# Altium PCB RadioPod-0_1.PcbDoc
Units mm, origin at the board's own origin, x right, y up, seen from the top; angles counter-clockwise.
Board outline 48.8 x 62.2 mm, 2 copper layers (Top Layer, Bottom Layer), stack 0.325 mm thick; 80 components, 115 nets, 434 pads, 94 vias.
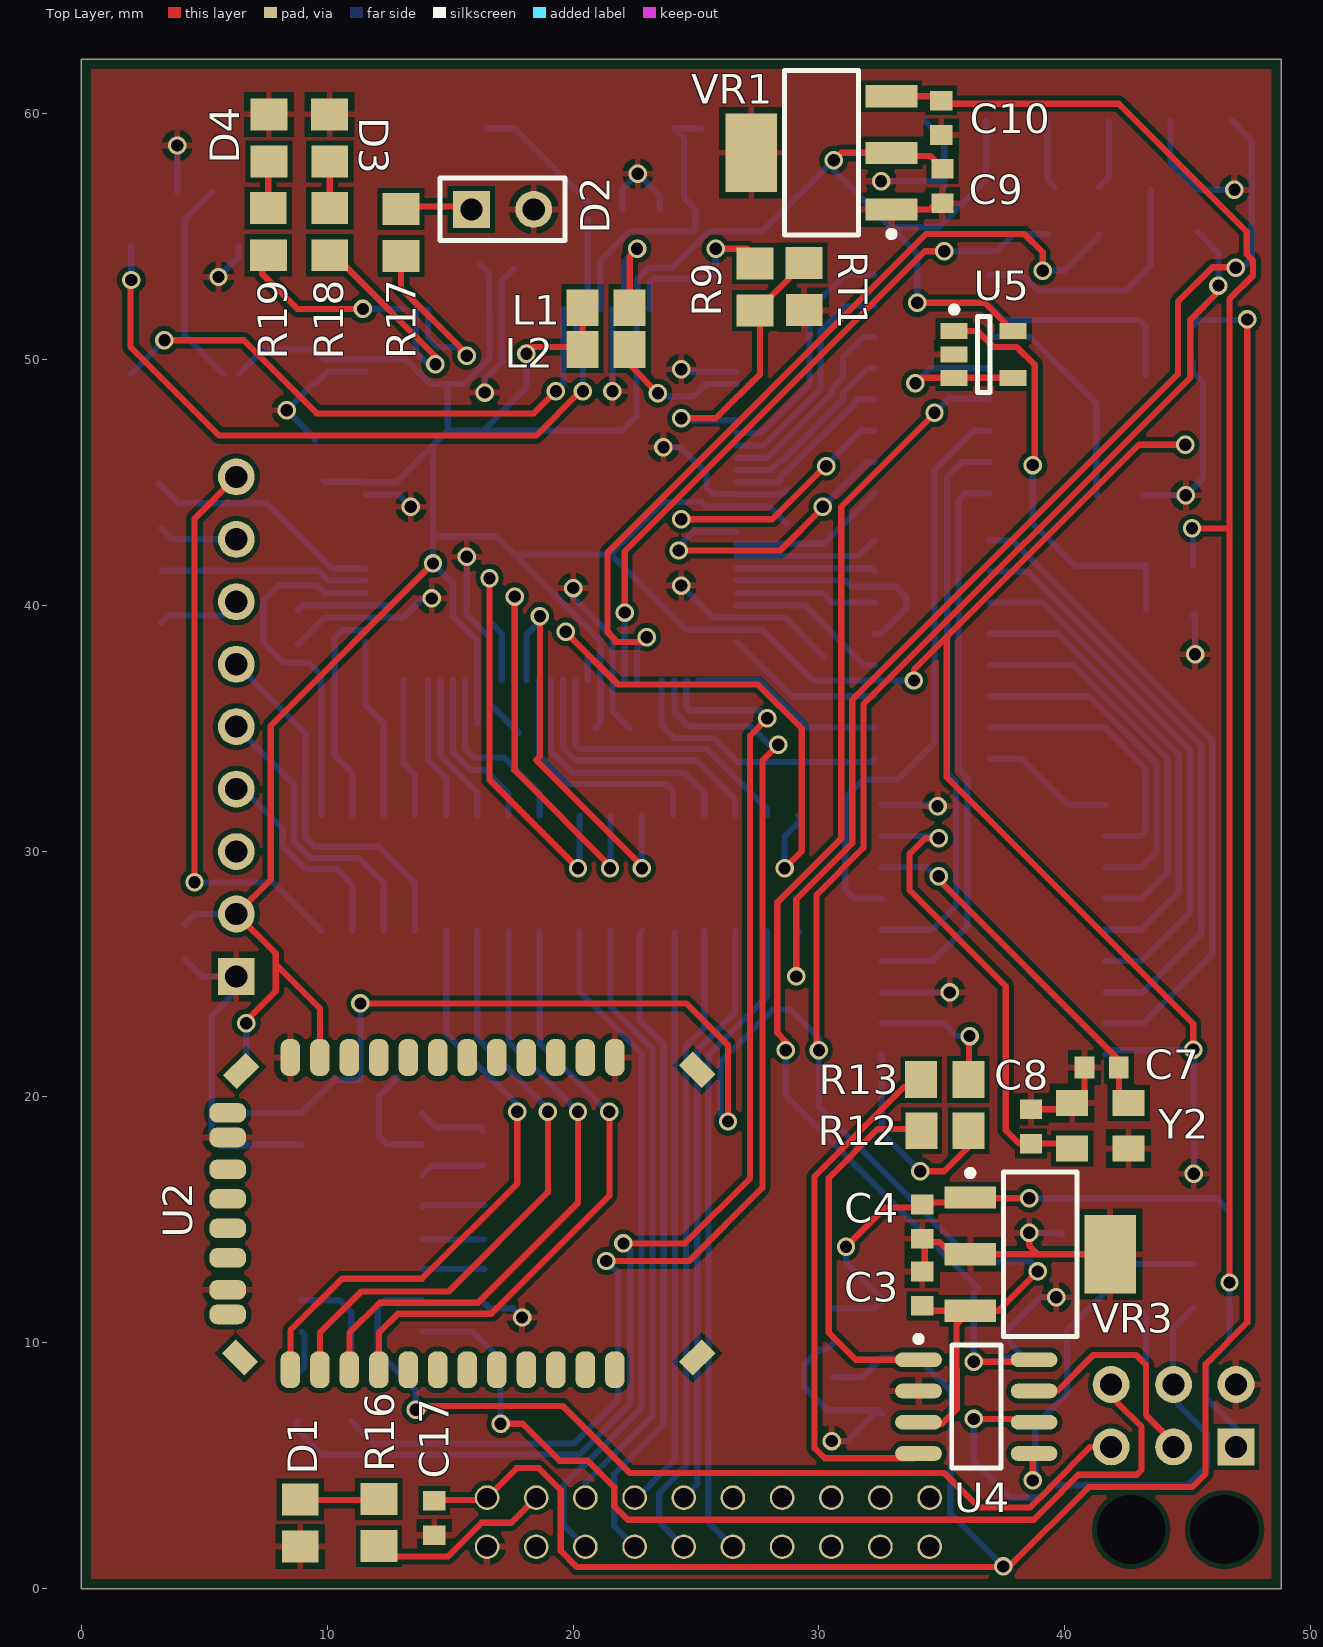
[diagram p0: Top Layer view]
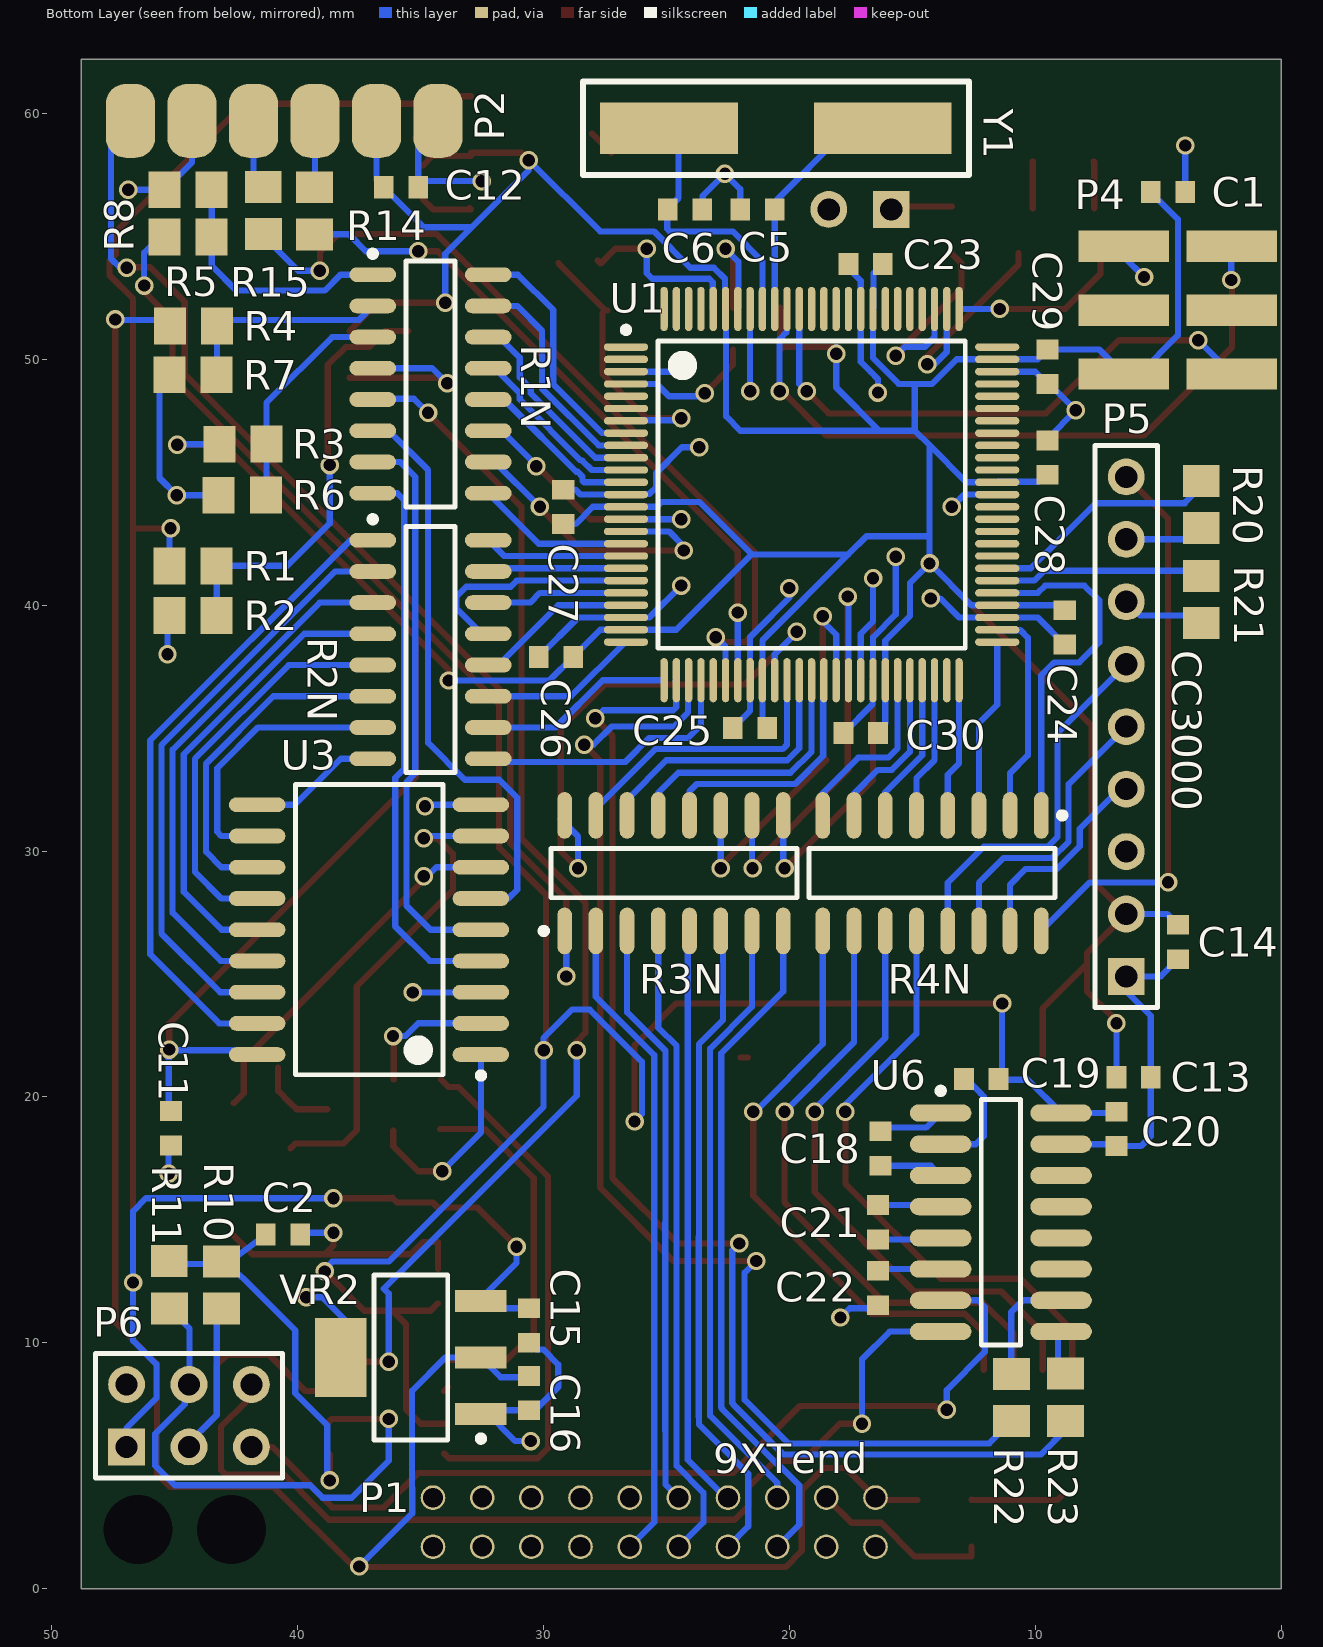
[diagram p1: Bottom Layer view, seen from below]

## Layer stack, top to bottom
Top Solder: solder mask 0.0102, Solder Resist, Dk 3.5
Top Layer: signal copper 0.0356
Dielectric 1: core 0.254, FR-4, Dk 4.2
Bottom Layer: signal copper 0.0356
Bottom Solder: solder mask 0.0102, Solder Resist, Dk 3.5

## Board outline
0,0 0,62.2 48.8,62.2 48.8,0

## Design rules (kind name [scope] priority, off if disabled: settings)
Clearance [All] p1: gap=0.2
HoleSize [All] p1: absolutevalues=TRUE maxlimit=3 minlimit=0.025 maxpercent=80.000 minpercent=20.000
MinimumSolderMaskSliver [All] p1: minsoldermaskwidth=0.2
PolygonConnect [All] p1: connectstyle=Relief reliefconductorwidth=0.254 reliefentries=4 polygonreliefangle="90 Angle" airgapwidth=0.254
RoutingVias [All] p1: holewidth=0.5 width=0.75 viastyle="Through Hole" minholewidth=0.5 minwidth=0.6 maxholewidth=5 maxwidth=3
SilkToSilkClearance [All] p1: silktosilkclearance=0.127
SilkToSolderMaskClearance [IsPad] p1: minsilkscreentomaskgap=0.2 clearancetoexposedcopper=TRUE
SolderMaskExpansion SolderMaskExpansion_1 [IsVia] p1: expansion=-1
SolderMaskExpansion [All] p2: expansion=0.102
Width [All] p1: maxlimit=1 minlimit=0.1 preferedwidth=0.254
26 further rules are at their usual default settings.

## Classes and differential pairs
component class RadioPod_3: C1 C2 C3 C4 C5 C6 C7 C8 C9 C10 C11 C12 C13 C14 C15 C16 C17 C18 C19 C20 C21 C22 C23 C24 C25 C26 C27 C28 C29 C30 D1 D2 D3 D4 L1 L2 P1 P4 P5 P6 R1N R2 R2N R3 R3N R4N R9 R10 R11 R18 R21 RT1 U1 U3 U4 U6 VR1 VR2 VR3 Y1 Y2

## Components (designator, comment, footprint, x,y, rotation, side; value= is the part's Value field where it differs from the comment)
C1 "Cap Semi" 1608[0603] 4.6,56.8 r0 bottom
C2 "Cap Semi" 1608[0603] 40.6,14.4 r0 bottom
C3 "Cap Semi" 1608[0603] 34.2,12.2 r90 top
C4 "Cap Semi" 1608[0603] 34.2,14.925 r270 top
C5 "Cap Semi" 1608[0603] 21.3,56.1 r0 bottom
C6 "Cap Semi" 1608[0603] 24.25,56.1 r180 bottom
C7 "Cap Semi" 1608[0603] 41.5,21.2 r180 top
C8 "Cap Semi" 1608[0603] 38.625,18.8 r90 top
C9 "Cap Semi" 1608[0603] 35.025,57.05 r270 top
C10 "Cap Semi" 1608[0603] 34.975,59.825 r270 top
C11 "Cap Semi" 1608[0603] 45.15,18.725 r270 bottom
C12 "Cap Semi" 1608[0603] 35.8,57 r180 bottom
C13 "Cap Semi" 1608[0603] 6,20.8 r180 bottom
C14 "Cap Semi" 1608[0603] 4.2,26.3 r270 bottom
C15 "Cap Semi" 1608[0603] 30.6,10.7 r90 bottom
C16 "Cap Semi" 1608[0603] 30.6,7.95 r90 bottom
C17 "Cap Semi" 1608[0603] 14.35,2.875 r90 top
C18 "Cap Semi" 1608[0603] 16.3,17.9 r90 bottom
C19 "Cap Semi" 1608[0603] 12.2,20.725 r180 bottom
C20 "Cap Semi" 1608[0603] 6.7,18.7 r90 bottom
C21 "Cap Semi" 1608[0603] 16.4,14.9 r90 bottom
C22 "Cap Semi" 1608[0603] 16.4,12.225 r90 bottom
C23 "Cap Semi" 1608[0603] 16.9,53.875 r0 bottom
C24 "Cap Semi" 1608[0603] 8.8,39.1 r270 bottom
C25 "Cap Semi" 1608[0603] 21.6,35 r0 bottom
C26 "Cap Semi" 1608[0603] 29.5,37.9 r0 bottom
C27 "Cap Semi" 1608[0603] 29.2,44 r90 bottom
C28 "Cap Semi" 1608[0603] 9.5,46 r90 bottom
C29 "Cap Semi" 1608[0603] 9.5,49.7 r270 bottom
C30 "Cap Semi" 1608[0603] 17.1,34.8 r0 bottom
D1 "LED2" 2012[0805]_LED 9.65,4.275 r180 top
D2 "AMBER" hdr1x2 15.86,56.1 r0 top
D3 "RED" 2012[0805]_LED 9.35,57.4 r0 top
D4 "YELLOW" 2012[0805]_LED 6.875,57.4 r0 top
L1 "Inductor" 2012[0805]_IND 22.95,51.35 r90 top
L2 "Inductor" 2012[0805]_IND 22.95,49.65 r90 top
P1 "9XTend" "9XTEND HEADER" 35.1,4.3 r270 bottom
P2 "EM-506" EM_506 33.3,58.2 r90 bottom
P4 "ISP Header" "ISP HEADER" 4.2,52 r90 bottom
P5 "CC3000" HDR1X9 6.3,24.9 r90 bottom
P6 "Chassis input pins" HDR2X3_CEN 46.965,5.76 r180 bottom
R1 "Res3" 2012[0805]_RES 45.966,42.448 r270 bottom
R1N "4816P" SOIC16_L 34.6,49 r180 bottom
R2 "Res3" 2012[0805]_RES 45.966,40.425 r270 bottom
R2N "4816P" SOIC16_L 34.6,38.2 r180 bottom
R3 "Res3" 2012[0805]_RES 43.941,47.398 r270 bottom
R3N "4816P" SOIC16_L 24.7,29.1 r90 bottom
R4 "Res3" 2012[0805]_RES 45.95,52.2 r270 bottom
R4N "4816P" SOIC16_L 14.2,29.1 r270 bottom
R5 "Res3" 2012[0805]_RES 46.166,55.823 r270 bottom
R6 "Res3" 2012[0805]_RES 43.966,45.323 r270 bottom
R7 "Res3" 2012[0805]_RES 45.966,50.223 r270 bottom
R8 "Res3" 2012[0805]_RES 46.166,57.748 r270 bottom
R9 "Res3" 2012[0805]_RES 28.25,54.65 r180 top
R10 "Res3" 2012[0805]_RES 43.948,10.634 r180 bottom
R11 "Res3" 2012[0805]_RES 46.075,10.65 r180 bottom
R12 "Res3" 2012[0805]_RES 36.841,17.775 r90 top
R13 "Res3" 2012[0805]_RES 36.825,19.852 r90 top
R14 "Res3" 2012[0805]_RES 38.475,57.75 r0 bottom
R15 "Res3" 2012[0805]_RES 40.552,57.766 r0 bottom
R16 "Res3" 2012[0805]_RES 11.25,0.975 r0 top
R17 "Res3" 2012[0805]_RES 12.15,53.45 r0 top
R18 "Res3" 2012[0805]_RES 9.252,53.484 r0 top
R19 "Res3" 2012[0805]_RES 6.752,53.484 r0 top
R20 "Res3" 2012[0805]_RES 2.4,45.8 r0 bottom
R21 "Res3" 2012[0805]_RES 2.402,41.941 r0 bottom
R22 "Res3" 2012[0805]_RES 10.125,9.475 r0 bottom
R23 "Res3" 2012[0805]_RES 7.927,9.491 r0 bottom
RT1 "Res Thermal" 2012[0805]_RES 30.248,54.666 r180 top
U1 "ATxmega128A1-AU" 100A_N 19.1,44.5 r180 bottom
U2 "RN-41" RN41 5.7,21.85 r270 top
U3 "MCP2515-I/SO" SOIC-SO18_N 37.1,26.8 r0 bottom
U4 "TJA1040" SO8_L 36.4,7.4 r0 top
U5 "MCP6001UT" SOT-23-OT5_N 36.7,50.2 r0 top
U6 "MAX232D" D016_M 11.4,14.9 r180 bottom
VR1 "NCV1117ST33T3G" SOT223_L 30.1,58.4 r180 top
VR2 "NCV1117ST33T3G" SOT223_L 35.4,9.4 r0 bottom
VR3 "UA78M05IDCY" SOT223_L 39,13.6 r0 top
Y1 "16MHz" CRYSTAL 13.4,60.45 r0 bottom
Y2 "20MHz" MCP2515_XTAL 43.426,17.216 r90 top

## Footprints (in the part's own frame and the unit in brackets; to place one, negate y for a bottom-side part, rotate by r counter-clockwise, add the part's x,y. Pads: shape width x height; smd on the part's side, far side on the other; paste and mask are expansions set on the pad)
"9XTEND HEADER" [mm]
  round 1 hole 0.8: P1(2.6,18.6) P2(0.6,18.6) P3(2.6,16.6) P4(0.6,16.6) P5(2.6,14.6) P6(0.6,14.6) P7(2.6,12.6) P8(0.6,12.6) P9(2.6,10.6) P10(0.6,10.6) P11(2.6,8.6) P12(0.6,8.6) P13(2.6,6.6) P14(0.6,6.6) P15(2.6,4.6) P16(0.6,4.6) P17(2.6,2.6) P18(0.6,2.6) P19(2.6,0.6) P20(0.6,0.6)
100A_N [mm] "Thin QFP, 100-Leads, Body 14x14mm, Pitch 0.5mm, IPC Medium Density"
  oval 1.8x0.3 smd: 1(-7.55,6) 2(-7.55,5.5) 3(-7.55,5) 4(-7.55,4.5) 5(-7.55,4) 6(-7.55,3.5) 7(-7.55,3) 8(-7.55,2.5) 9(-7.55,2) 10(-7.55,1.5) 11(-7.55,1) 12(-7.55,0.5) 13(-7.55,0) 14(-7.55,-0.5) 15(-7.55,-1) 16(-7.55,-1.5) 17(-7.55,-2) 18(-7.55,-2.5) 19(-7.55,-3) 20(-7.55,-3.5) 21(-7.55,-4) 22(-7.55,-4.5) 23(-7.55,-5) 24(-7.55,-5.5) 25(-7.55,-6) 51(7.55,-6) 52(7.55,-5.5) 53(7.55,-5) 54(7.55,-4.5) 55(7.55,-4) 56(7.55,-3.5) 57(7.55,-3) 58(7.55,-2.5) 59(7.55,-2) 60(7.55,-1.5) 61(7.55,-1) 62(7.55,-0.5) 63(7.55,0) 64(7.55,0.5) 65(7.55,1) 66(7.55,1.5) 67(7.55,2) 68(7.55,2.5) 69(7.55,3) 70(7.55,3.5) 71(7.55,4) 72(7.55,4.5) 73(7.55,5) 74(7.55,5.5) 75(7.55,6)
  oval 0.3x1.8 smd: 26(-6,-7.55) 27(-5.5,-7.55) 28(-5,-7.55) 29(-4.5,-7.55) 30(-4,-7.55) 31(-3.5,-7.55) 32(-3,-7.55) 33(-2.5,-7.55) 34(-2,-7.55) 35(-1.5,-7.55) 36(-1,-7.55) 37(-0.5,-7.55) 38(0,-7.55) 39(0.5,-7.55) 40(1,-7.55) 41(1.5,-7.55) 42(2,-7.55) 43(2.5,-7.55) 44(3,-7.55) 45(3.5,-7.55) 46(4,-7.55) 47(4.5,-7.55) 48(5,-7.55) 49(5.5,-7.55) 50(6,-7.55) 76(6,7.55) 77(5.5,7.55) 78(5,7.55) 79(4.5,7.55) 80(4,7.55) 81(3.5,7.55) 82(3,7.55) 83(2.5,7.55) 84(2,7.55) 85(1.5,7.55) 86(1,7.55) 87(0.5,7.55) 88(0,7.55) 89(-0.5,7.55) 90(-1,7.55) 91(-1.5,7.55) 92(-2,7.55) 93(-2.5,7.55) 94(-3,7.55) 95(-3.5,7.55) 96(-4,7.55) 97(-4.5,7.55) 98(-5,7.55) 99(-5.5,7.55) 100(-6,7.55)
  silkscreen extent -7.68,-6.25 6.25,6.82, body extent -7,-7 7,7, height 1.2
1608[0603] [mm] "Chip Capacitor, Body 1.6x0.8mm, IPC High Density"
  rect 0.8x0.9 smd: 1(-0.7,0) 2(0.7,0)
  body extent -0.87,-0.48 0.87,0.48, height 1.3
2012[0805]_IND [mm]
  rect 1.5x1.3 smd: 1(0.75,0.65) 2(0.748,2.566)
  body extent 0.1,0.2 1.4,3, height 1.5
2012[0805]_LED [mm]
  rect 1.5x1.3 smd: 1(0.75,0.65) 2(0.748,2.566)
  body extent 0.1,0.2 1.4,3, height 1
2012[0805]_RES [mm] "2012[0805] Resistor"
  rect 1.5x1.3 smd: 1(0.85,0.75) 2(0.848,2.666)
  body extent 0.2,0.3 1.5,3.1, height 0.5
CRYSTAL [mm]
  rect 5.6x2.1 smd: 1(2.8,1.05) 2(11.5,1.05)
  silkscreen extent -0.7,-0.85 15,2.95, body extent 1.28,-0.85 13.23,2.95, height 4
D016_M [mm] "SOIC, 16-Leads, Body 9.9x3.9mm, Pitch 1.27mm, IPC Low Density"
  oval 2.5x0.7 smd: 1(-2.45,4.445) 2(-2.45,3.175) 3(-2.45,1.905) 4(-2.45,0.635) 5(-2.45,-0.635) 6(-2.45,-1.905) 7(-2.45,-3.175) 8(-2.45,-4.445) 9(2.45,-4.445) 10(2.45,-3.175) 11(2.45,-1.905) 12(2.45,-0.635) 13(2.45,0.635) 14(2.45,1.905) 15(2.45,3.175) 16(2.45,4.445)
  silkscreen extent -2.58,-5 0.8,5.47, body extent -2,-5 2,5, height 1.75
EM_506 [mm]
  rrect80% 3x2 smd: A1(1.5,1) A2(1.5,3.5) A3(1.5,6) A4(1.5,8.5) A5(1.5,11) A6(1.5,13.5)
hdr1x2 [mm] "Connector; Header; 2 Position"
  rect 1.5x1.5 hole 0.9: 1(0,0)
  round 1.5 hole 0.9: 2(2.54,0)
  silkscreen extent -1.27,-1.27 3.81,1.27
HDR1X9 [mm] "Connector; Header; 9 Position"
  rect 1.5x1.5 hole 0.9: 1(0,0)
  round 1.5 hole 0.9: 2(2.54,0) 3(5.08,0) 4(7.62,0) 5(10.16,0) 6(12.7,0) 7(15.24,0) 8(17.78,0) 9(20.32,0)
  silkscreen extent -1.27,-1.27 21.59,1.27
HDR2X3_CEN [mm] "Connector; Header; 3x2 Position"
  rect 1.5x1.5 hole 0.9: 1(0,0)
  round 1.5 hole 0.9: 2(2.54,0) 3(5.08,0) 4(0,2.54) 5(2.54,2.54) 6(5.08,2.54)
  silkscreen extent -1.27,-1.27 6.35,3.81
"ISP HEADER" [mm]
  rect 1.27x3.68 smd: 1(-2.6,-2.2) 2(-2.6,2.2) 3(0,-2.2) 4(0,2.2) 5(2.6,-2.2) 6(2.6,2.2)
  body extent -3.75,-2.5 3.75,2.5, height 10
MCP2515_XTAL [mm]
  rect 1.05x1.3 smd: 1(0.684,3.126) 2(2.534,0.826) 3(0.684,0.826) 4(2.534,3.126)
RN41 [mm]
  rrect80% 1.5x0.8 smd mask+0.2: 1(0.25,16) 2(0.25,14.8) 3(0.25,13.6) 4(0.25,12.4) 5(0.25,11.2) 6(0.25,10) 7(0.25,8.8) 8(0.25,7.6) 9(0.25,6.4) 10(0.25,5.2) 11(0.25,4) 12(0.25,2.8) 13(12.95,2.8) 14(12.95,4) 15(12.95,5.2) 16(12.95,6.4) 17(12.95,7.6) 18(12.95,8.8) 19(12.95,10) 20(12.95,11.2) 21(12.95,12.4) 22(12.95,13.6) 23(12.95,14.8) 24(12.95,16)
  rrect80% 0.8x1.5 smd mask+0.25: 28(9.7,0.25) 29(3.5,0.25) 31(8.4,0.25) 34(4.8,0.25)
  rrect80% 0.8x1.5 smd mask+0.2: 30(10.7,0.25) 32(7.2,0.25) 33(6,0.25) 35(2.5,0.25)
  rect 0.8x1.3 smd rot 135: SH1(0.75,19.35) SH3(12.45,0.75)
  rect 0.8x1.3 smd rot 45: SH2(0.8,0.8) SH4(12.45,19.35)
  body extent 1,1 12.2,25.8, height 1
SO8_L [mm] "SOIC, 8-Leads, Body 4.9x3.9mm, Pitch 1.27mm, IPC High Density"
  oval 1.9x0.6 smd: 1(-2.35,1.905) 2(-2.35,0.635) 3(-2.35,-0.635) 4(-2.35,-1.905) 5(2.35,-1.905) 6(2.35,-0.635) 7(2.35,0.635) 8(2.35,1.905)
  silkscreen extent -2.47,-2.5 1,2.88, body extent -2,-2.5 2,2.5, height 1.75
SOIC16_L [mm] "SOIC, 16-Leads, Body 9.9x3.9mm, Pitch 1.27mm, IPC High Density"
  oval 1.9x0.6 smd: 1(-2.35,4.445) 2(-2.35,3.175) 3(-2.35,1.905) 4(-2.35,0.635) 5(-2.35,-0.635) 6(-2.35,-1.905) 7(-2.35,-3.175) 8(-2.35,-4.445) 9(2.35,-4.445) 10(2.35,-3.175) 11(2.35,-1.905) 12(2.35,-0.635) 13(2.35,0.635) 14(2.35,1.905) 15(2.35,3.175) 16(2.35,4.445)
  silkscreen extent -2.48,-5 1,5.42, body extent -2,-5 2,5, height 1.91
SOIC-SO18_N [mm] "SOIC, 18-Leads, Body 11.5x7.5mm, Pitch 1.27mm, IPC Medium Density"
  oval 2.3x0.6 smd: 1(-4.55,5.08) 2(-4.55,3.81) 3(-4.55,2.54) 4(-4.55,1.27) 5(-4.55,0) 6(-4.55,-1.27) 7(-4.55,-2.54) 8(-4.55,-3.81) 9(-4.55,-5.08) 10(4.55,-5.08) 11(4.55,-3.81) 12(4.55,-2.54) 13(4.55,-1.27) 14(4.55,0) 15(4.55,1.27) 16(4.55,2.54) 17(4.55,3.81) 18(4.55,5.08)
  silkscreen extent -4.67,-5.9 3,6.05, body extent -3.8,-5.95 3.8,5.95, height 2.65
SOT223_L [mm] "SOT223, 4-Leads, Body 6.5x3.5mm, Pitch 2.3mm, Lead Span 7mm, IPC High Density"
  rect 2.1x0.9 smd: 1(-2.85,2.3) 2(-2.85,0) 3(-2.85,-2.3)
  rect 2.1x3.2 smd: 4(2.85,0)
  silkscreen extent -2.98,-3.35 1.5,3.42, body extent -1.85,-3.35 1.85,3.35, height 1.7
SOT-23-OT5_N [mm] "SOT23, 5-Leads, Body 2.9x1.6mm, Pitch 0.95mm, Lead Span 2.7mm, IPC Medium Density"
  rect 1.1x0.65 smd mask+0.17: 1(-1.2,0.95) 2(-1.2,0) 3(-1.2,-0.95)
  rect 1.1x0.65 smd: 4(1.2,-0.95) 5(1.2,0.95)
  silkscreen extent -1.32,-1.55 0.25,1.95, body extent -0.9,-1.55 0.9,1.55, height 1.45

## Part data
C1 C2 C3 C4 C5 C6 C7 C8 C9 C10 C11 C12 C13 C14 C15 C16 C17 C18 C19 C20 C21 C22 C23 C24 C25 C26 C27 C28 C29 C30: "Capacitor (Semiconductor SIM Model)"
D1: "Typical RED, GREEN, YELLOW, AMBER GaAs LED"
D2: library part LED0, "Typical INFRARED GaAs LED"
D3 D4: library part LED2, "Typical RED, GREEN, YELLOW, AMBER GaAs LED"
P1: "9XTend Header Pins"
P2: "EM-506 GPS Module Pads"
P4: library part "Header 3X2", "Header, 3-Pin, Dual row"
P5: "CC3000 Wifi Module"
R1 R2 R3 R4 R5 R6 R7 R8 R9 R10 R11 R12 R13 R14 R15 R16 R17 R18 R19 R20 R21 R22 R23: "Resistor"
R1N R2N R3N R4N: "Resistor Network SOIC-16 package"
RT1: "Thermistor"
U1: "8/16-bit AVR XMEGA A1 Microcontroller, 1.6-3.6V, 128KB + 8KB Flash, 2KB EEPROM, 8KB SRAM, 100-pin TQFP, Industrial Grade (-40°C to 85°C), Pb-Free"
U2: library part RN41, "RN-41 Bluetooth Module"
U3: "Stand-Alone CAN Controller With SPI Interface, 18-Pin SOIC, Industrial Temperature"
U5: library part MCP6001UT-I/OT, "1 MHz, Low-Power Operational Amplifier, 5-Pin SOT-23, Industrial Temperature, Tape and Reel"
U6: "Dual EIA-232 Driver/Receiver"
Y1 Y2: library part XTAL, "Crystal Oscillator"

## Free pads (board coordinates)
  rrect50% 2x2 hole 2.8 unplated: 0(42.7,2.4) 0(46.5,2.4)

## Via types
v1: diameter 0.75, hole 0.5, Top Layer to Bottom Layer, 94 vias

## Nets (pads, with @x,y where several pads share a name; then routed paths per layer and width w, separated by ;. In a path a pad name is that pad's centre, name@x,y a point inside that pad or via, vN(x,y) a via of type N, cw(c..) or ccw(c..) an arc to the next point about the centre after c; other vN are vias at no path point)
9XTEND_CONFIG_1: R3N.15 U1.36 | length 11.8
  Bottom Layer w0.254: U1.36 20.1,34.326 20.28,34.146 25.454,34.146 27.875,31.725 R3N.15
9XTEND_CONFIG_2: P1.P11 R3N.2 | length 26.5
  Bottom Layer w0.254: P1.P11 25.5,2.7 25.5,6.231 25.503,6.234 25.503,15.077 25.5,15.08 25.5,21.7 27.875,24.075 R3N.2
9XTEND_DI_1: R3N.9 U1.42 | length 19.8
  Top Layer w0.254: v1(16.6,41.1) 16.6,32.9 v1(20.2,29.3)
  Bottom Layer w0.254: v1(16.6,41.1) 16.6,39.342 17.1,38.842 U1.42 ; v1(20.2,29.3) 20.255,29.355 R3N.9
9XTEND_DI_2: P1.P5 R3N.8 | length 27.8
  Bottom Layer w0.254: R3N.8 20.255,24.291 22.776,21.77 22.776,13.952 22.779,13.949 22.779,7.362 22.733,7.316 22.733,7.299 20.43,4.996 20.396,4.996 19.6,4.2 19.6,2.6 P1.P5
9XTEND_DO_1: R3N.10 U1.41 | length 18
  Top Layer w0.254: v1(17.625,40.35) 17.625,33.325 17.6,33.3 v1@21.6,29.3
  Bottom Layer w0.254: U1.41 v1@17.6,40.025 ; v1(21.5,29.3) 21.525,29.325 R3N.10
9XTEND_DO_2: P1.P6 R3N.7 | length 24.9
  Bottom Layer w0.254: P1.P6 20.5,4.3 23.23,7.03 23.23,7.171 23.233,7.174 23.233,14.137 23.23,14.14 23.23,21.958 21.525,23.663 R3N.7
9XTEND_GPI1_1: R3N.14 U1.37 | length 11.3
  Bottom Layer w0.254: U1.37 19.6,34.184 20.092,33.692 25.008,33.692 26.605,32.095 R3N.14
9XTEND_GPI1_2: P1.P10 R3N.3 | length 23.9
  Bottom Layer w0.254: P1.P10 25.046,4.246 25.046,6.419 25.049,6.422 25.049,14.889 25.046,14.892 25.046,21.888 26.605,23.447 R3N.3
9XTEND_GPI2_1: R3N.12 U1.39 | length 10.1
  Bottom Layer w0.254: U1.39 18.623,36.927 18.623,33.877 19.773,32.727 23.773,32.727 24.065,32.435 R3N.12
9XTEND_GPI2_2: P1.P8 R3N.5 | length 23.6
  Bottom Layer w0.254: P1.P8@22.6,3.7 24.138,5.238 24.138,6.795 24.141,6.798 24.141,14.513 24.138,14.516 R3N.5@24.138,26.677
9XTEND_GPO1_1: R3N.13 U1.38 | length 10.8
  Bottom Layer w0.254: U1.38 19.1,34.042 19.961,33.181 24.519,33.181 25.335,32.365 R3N.13
9XTEND_GPO1_2: P1.P9 R3N.4 | length 26.2
  Bottom Layer w0.254: P1.P9 23.5,2.7 23.5,3.9 24.592,4.992 24.592,6.607 24.595,6.61 24.595,14.701 24.592,14.704 24.592,22.076 25.335,22.819 R3N.4
9XTEND_SHDN_1: R3N.11 U1.40 | length 17
  Top Layer w0.254: v1(18.65,39.55) 18.65,33.85 18.5,33.7 v1@22.8,29.4
  Bottom Layer w0.254: U1.40 18.1,38.8 18.65,39.35 v1(18.65,39.55) ; R3N.11 22.795,29.305 v1(22.8,29.3)
9XTEND_SHDN_2: P1.P7 R3N.6 | length 26.7
  Bottom Layer w0.254: P1.P7 21.673,2.527 21.673,4.673 23.684,6.684 23.684,6.983 23.687,6.986 23.687,14.325 23.684,14.328 23.684,22.146 22.698,23.132 22.698,26.653 R3N.6
9XTEND_TXPWR_1: P1.P4 R16.1 | length 7.3
  Top Layer w0.254: R16.1@12.6,1.7 12.6,1.3 14.9,1.3 16.275,2.675 17.475,2.675 P1.P4
9XTEND_TXPWR_2: D1.1 R16.2 | length 3.8
  Top Layer w0.254: D1.1@8.9,3.8 9.1,3.6 12.582,3.6 R16.2@12.598,3.616
CANH: P6.2 R10.1 U4.7 | length 15.5
  Top Layer w0.254: U4.7 39.685,8.035 41.15,9.5 42.9,9.5 43.3,9.1 43.3,7.06 P6.2@44.6,5.76
  Bottom Layer w0.254: R10.1@42.998,11.384 43.3,11.082 43.3,7.06 P6.2@44.6,5.76
CANL: P6.5 R11.1 U4.6 | length 22.1
  Top Layer w0.254: v1(36.3,6.9) 38.615,6.9 U4.6
  Bottom Layer w0.254: v1(36.3,6.9) 36.3,5.2 37.802,3.698 38.991,3.698 39.493,4.2 45,4.2 45.8,5 45.8,6.3 44.6,7.5 P6.5@44.6,8.3 ; P6.5@44.598,8.398 44.4,8.596 44.4,10.575 R11.1
CC3000_CLK_1: R4N.2 U1.52 | length 8.9
  Bottom Layer w0.254: R4N.2 11.025,33.175 10.3,33.9 10.3,38.675 10.602,38.977 11.527,38.977 U1.52
CC3000_CLK_2: P5.4 R4N.15 | length 8.6
  Bottom Layer w0.254: P5.4 6.58,32.52 8.192,30.908 8.192,30.192 9.119,29.265 10.4,29.265 11.025,28.64 R4N.15
CC3000_CS_1: R21.1 U1.56 | length 8.5
  Bottom Layer w0.254: R21.1@3.252,41.4 9.642,41.4 10.042,41 U1.56
CC3000_CS_2: P5.7 R21.2 | length 3.4
  Bottom Layer w0.254: R21.2 3.559,39.584 5.744,39.584 P5.7
CC3000_IRQ_1: R4N.1 U1.55 | length 14.8
  Bottom Layer w0.254: R4N.1 9.755,37.145 9.227,37.673 8.215,37.673 7.4,38.488 7.4,40.2 8,40.8 9.6,40.8 9.9,40.5 U1.55
CC3000_IRQ_2: P5.9 R4N.16 | length 23.2
  Top Layer w0.254: v1(4.6,28.725) 4.6,43.52 P5.9
  Bottom Layer w0.254: v1(4.6,28.725) 7.78,28.725 R4N.16
CC3000_MISO_1: R4N.3 U1.51 | length 7.4
  Bottom Layer w0.254: U1.51 11.55,35.95 12.295,35.205 R4N.3
CC3000_MISO_2: P5.5 R4N.14 | length 11.9
  Bottom Layer w0.254: P5.5 8.646,32.714 8.646,30.38 9.307,29.719 11.281,29.719 12.295,28.705 R4N.14
CC3000_MOSI_1: R4N.4 U1.50 | length 5.7
  Bottom Layer w0.254: U1.50 13.1,33.565 13.565,33.1 R4N.4
CC3000_MOSI_2: P5.6 R4N.13 | length 15.4
  Bottom Layer w0.254: P5.6 9.1,34.8 9.1,30.568 9.495,30.173 12.1,30.173 13.565,28.708 R4N.13
CC3000_VBEN_1: R20.1 U1.57 | length 9.8
  Bottom Layer w0.254: R20.1@3.15,44.95 3.907,44.193 ; 3.907,44.143 7.541,44.143 10.184,41.5 U1.57
CC3000_VBEN_2: P5.8 R20.2 | length 3.2
  Bottom Layer w0.254: R20.2 3.702,42.68 P5.8
EM-506_DIR_1: R3N.16 U1.35 | length 21.7
  Top Layer w0.254: v1@19.8,38.8 21.825,36.775 27.518,36.775 29.3,34.993 29.3,30 v1(28.6,29.3)
  Bottom Layer w0.254: v1@19.8,38.8 20.6,38 U1.35 ; v1(28.6,29.3) 28.6,30.595 29.3,31.295 R3N.16
  other v1: 19.7,38.925
EM-506_DIR_2: P2.A6 R3N.1 | length 45.7
  Top Layer w0.254: v1(29.075,24.9) 29.075,28.04 31.356,30.321 31.356,36.156 44.6,49.4 44.6,52.343 46.007,53.75 46.743,53.75 46.952,53.54 v1(46.952,53.728)
  Bottom Layer w0.254: v1(29.075,24.9) 29.075,26.57 29.2,26.695 R3N.1 ; P2.A6 47.602,58.898 47.602,54.102 47.228,53.728 v1(46.952,53.728)
EM-506_RXD_1: R15.2 U1.31 | length 34.2
  Top Layer w0.254: v1(23,38.7) 22.798,38.498 21.702,38.498 21.702,38.605 21.398,38.909 21.398,42.133 34.367,55.102 35.391,55.102 35.395,55.098 38.352,55.098 39.1,54.35 v1(39.1,53.6)
  Bottom Layer w0.254: U1.31 22.6,38.3 v1(23,38.7) ; v1(39.1,53.6) 39.976,53.6 41.4,55.024 R15.2
EM-506_RXD_2: P2.A4 R15.1 | length 2.8
  Bottom Layer w0.254: R15.1 41.8,57.414 P2.A4
EM-506_TXD_1: R14.2 U1.32 | length 27.8
  Top Layer w0.254: v1(22.1,39.7) 22.1,42.193 34.307,54.4 v1(35.1,54.4)
  Bottom Layer w0.254: U1.32 v1(22.1,39.7) ; v1(35.1,54.4) 37.232,54.4 37.916,55.084 R14.2
EM-506_TXD_2: P2.A3 R14.1 | length 2.8
  Bottom Layer w0.254: P2.A3 39.3,57.3 R14.1@39.6,57
GLV: C4.1 C10.1 C15.2 P6.1 R1.1 VR1.3 VR2.3 VR3.1 | length 95.2
  Top Layer w0.254: v1(31.1,13.9) 32.7,15.5 34.3,15.5 34.5,15.7 35.95,15.7 VR3.1 36.175,15.875 v1(38.55,15.875) ; VR1.3 34.6,60.7 34.9,60.4 42.2,60.4 47.402,55.198 47.402,54.271 47.654,54.018 47.654,53.412 46.7,52.457 46.7,43.125 ; v1(45.175,43.125) 46.7,43.125 ; v1(46.7,12.45) 46.7,43.125
  Bottom Layer w0.254: C15.2 32.25,11.4 VR2.3 32.6,11.75 31.1,13.25 v1(31.1,13.9) ; v1(38.55,15.875) 46.175,15.875 46.7,15.35 46.7,10.075 45.75,9.125 45.75,7.75 46.965,6.535 P6.1 ; v1(45.175,43.125) 45.175,43.121 45.216,43.162 R1.1
GLV_PBADC61: R1N.13 U1.11 | length 7.5
  Bottom Layer w0.254: U1.11 28.046,45.5 28.427,45.881 28.481,45.881 30.973,48.373 30.973,48.625 31.983,49.635 R1N.13
GLV_PBADC62: R1N.4 U5.3 U5.4 | length 7.3
  Top Layer w0.254: v1(33.925,49.025) 34.15,49.25 U5.3 U5.4
  Bottom Layer w0.254: v1(33.925,49.025) 34.535,49.635 R1N.4
GND: C1.1 C2.1 C3.2 C4.2 C5.2 C6.2 C7.2 C8.2 C9.2 C10.2 C11.2 C12.2 C13.2 C14.2 C15.1 C16.1 C17.1 C20.1 C22.1 C23.2 C24.2 C25.2 C26.2 C27.2 C28.2 C29.2 C30.2 D1.2 D2.2 D3.2 D4.2 P1.P1 P2.A1 P2.A5 P4.6 P5.1 P6.4 R2.1 R6.1 R7.1 R8.1 RT1.2 U1.3 U1.13 U1.23 U1.33 U1.43 U1.53 U1.63 U1.73 U1.84 U1.93 U2.1 U2.12 U2.28 U2.29 U3.3 U3.9 U4.2 U5.2 U6.15 VR1.1 VR1.4 VR2.1 VR2.4 VR3.2 VR3.4 Y2.3 Y2.4 | length 134.5
  Top Layer w0.254: U2.1 U2.1@21.987,21.6 ; VR1.4 VR1.4@28.027,59.177 ; VR1.1@33,56.15 VR1.1 34.5,56.1 C9.2@34.9,56.5 ; U4.2@33.885,8.2 U4.2 ; C3.2@34.3,13 34.3,14.1 34.9,14.1 35.4,13.6 VR3.2 36.152,13.602 38.9,13.602 ; C10.2@34.9,59.177 34.9,59 C10.2@35.2,59 ; v1(38.55,14.475) 38.55,13.952 38.9,13.602 ; C8.2@38.8,19.5 40.05,19.5 Y2.4 40.8,20.25 C7.2 ; VR3.4@42.6,14.35 VR3.4 41.848,13.602 38.9,13.602
  Bottom Layer w0.254: C1.1 v1(3.9,58.7) ; C14.2 4.9,24.9 P5.1 6.3,24.3 5.3,23.3 5.3,18.4 5.7,18 C20.1 6.775,18.075 U6.15 ; v1(5.575,53.35) 6.4,54.175 P4.6 ; C24.2 9.9,39.5 U1.53 13.1,39.5 13.875,40.275 v1(14.25,40.275) ; C28.2 9.5,46.775 v1(8.35,47.925) 9.425,49 C29.2 10,49.5 U1.73 ; U1.63 12.9,44.5 v1(13.4,44) ; v1(15.675,41.975) 15.675,39.625 16.6,38.7 U1.43 16.623,36.927 16.623,35.977 C30.2 ; C22.1@16.4,11.6 16.6,11.4 17.55,11.4 v1(17.925,11.025) ; v1(16.4,48.65) 16.4,49.2 16.7,49.5 17.1,49.9 U1.84 17.1,53.2 C23.2@17.6,53.7 ; v1(20.004,40.696) 20.004,40.304 21.398,38.909 21.6,38.707 U1.33 21.6,35.7 C25.2 ; U1.93@21.577,52.027 U1.93 v1(21.6,48.7) ; C5.2 22,56.925 v1(22.625,57.55) 23.525,56.65 C6.2@23.525,56.1 ; v1(23.675,46.425) 24.375,46.425 25.423,45.377 25.423,44.802 25.702,44.523 26.627,44.523 U1.13 28.5,44.5 28.7,44.7 ; v1@24.3,49.5 U1.3 ; v1(24.4,40.8) 25.7,39.5 U1.23 28.6,39.5 C26.2 ; v1(30.525,6) 31.15,6 VR2.1@32.4,7.25 ; C15.1 30.327,9.727 30.015,9.727 29.4,9.112 29.4,8.2 30.35,7.25 VR2.1@32.4,7.25 ; v1(32.525,57.25) 35.05,57.25 35.1,57.3 C12.2 35.1,58.9 P2.A1 ; VR2.1 VR2.1@32.4,7.25 ; U3.3 32.56,24.25 v1(35.325,24.25) ; U3.9 34.77,31.88 v1(34.825,31.825) ; VR2.4@37.6,9.4 VR2.4 38.3,9.45 37.45,10.3 39,11.85 v1(39.65,11.85) ; v1(38.55,14.475) 39.825,14.475 C2.1 ; R6.1 44.923,44.473 v1(44.925,44.475) 45.625,45.175 45.625,49.075 45.2,49.5 R7.1@45.2,49.9 ; P2.A5 44.3,58.014 R8.1 v1(46.9,56.898) ; R2.1 45.3,39.659 v1(45.3,38) ; v1(45.25,16.875) 45.263,16.875 C11.2@45.263,18.137
  other v1: 24.4,49.6
ISP_PDI_CLOCK: P4.5 U1.90 | length 28.2
  Top Layer w0.254: v1(2.025,53.228) 2,53.202 2,50.5 5.6,46.9 18.493,46.9 20.293,48.7 v1(20.4,48.7)
  Bottom Layer w0.254: P4.5 2.025,54.575 v1(2.025,53.228) ; U1.90 20.123,52.027 20.123,51.102 20.4,50.825 v1(20.4,48.7)
ISP_PDI_DATA: P4.1 U1.89 | length 22.9
  Top Layer w0.254: v1(3.375,50.775) 6.6,50.775 9.575,47.8 18.4,47.8 v1(19.3,48.7)
  Bottom Layer w0.254: P4.1 v1(3.375,50.775) ; v1(19.3,48.7) 19.6,49 U1.89
LED2_1: R17.1 U1.78 | length 8.2
  Top Layer w0.254: R17.1@13.4,54.3 13,53.9 13,52.9 15.423,50.477 v1@15.423,50.303
  Bottom Layer w0.254: U1.78 14.1,50.9 14.5,50.5 15.325,50.5 v1(15.675,50.15)
LED2_2: D2.1 R17.2 | length 2.5
  Top Layer w0.254: R17.2@13.398,56.216 15.744,56.216 D2.1
LED3_1: R18.1 U1.77 | length 8.8
  Top Layer w0.254: R18.1@10.687,54.312 10.687,53.838 14.398,50.127 14.398,49.802 v1(14.4,49.8)
  Bottom Layer w0.254: U1.77 13.6,50.3 14.1,49.8 v1(14.4,49.8)
LED3_2: D3.1 R18.2 | length 1.9
  Top Layer w0.254: R18.2 D3.1
LED4_1: R19.1 U1.76 | length 7.1
  Top Layer w0.254: R19.1@7.352,54.234 7.352,53.473 8.775,52.05 v1(11.45,52.05)
  Bottom Layer w0.254: v1(11.45,52.05) U1.76
LED4_2: D4.1 R19.2 | length 1.9
  Top Layer w0.254: R19.2 7.6,58.025 D4.1
MAX232_C1_1: C18.2 U6.1 | length 2.8
  Bottom Layer w0.254: U6.1 14.443,18.752 16.3,18.752 C18.2
MAX232_C1_2: C18.1 U6.3 | length 2.6
  Bottom Layer w0.254: U6.3 14.245,17.2 C18.1
MAX232_C2_1: C21.2 U6.4 | length 2.6
  Bottom Layer w0.254: U6.4 13.915,15.6 C21.2
MAX232_C2_2: C21.1 U6.5 | length 2.6
  Bottom Layer w0.254: U6.5 13.915,14.2 C21.1
MAX232_R2OUT_1: R23.2 U1.27 | length 51.7
  Top Layer w0.254: v1(22.046,14.04) 24.54,14.04 27.198,16.698 27.198,34.698 v1(27.9,35.4)
  Bottom Layer w0.254: R23.2 8.775,6.45 9.775,5.45 20.242,5.45 22.279,7.487 22.279,7.504 22.325,7.55 22.325,13.761 v1(22.046,14.04) ; U1.27@24.623,36.927 U1.27 24.6,35.854 24.731,35.723 27.577,35.723 v1(27.9,35.4)
MAX232_R2OUT_2: R23.1 U6.9 | length 1.9
  Bottom Layer w0.254: R23.1 9.077,9.041 9.077,10.323 8.95,10.45 U6.9
MAX232_T2OUT_1: R22.2 U1.28 | length 49.8
  Top Layer w0.254: v1(21.35,13.325) 24.725,13.325 27.7,16.3 27.7,33.675 v1(28.35,34.325)
  Bottom Layer w0.254: R22.2 11.878,5.904 20.054,5.904 21.825,7.675 21.825,12.85 v1(21.35,13.325) v1@21.325,13.325 ; U1.28 24.123,36.927 24.123,35.643 24.704,35.062 27.238,35.062 27.975,34.325 v1(28.35,34.325)
MAX232_T2OUT_2: R22.1 U6.10 | length 4.7
  Bottom Layer w0.254: U6.10 10.5,11.725 10.975,11.25 R22.1
MAX232_VS+: C19.1 U6.2 | length 4.6
  Bottom Layer w0.254: C19.1@12.85,20.775 12.227,20.152 12.227,20.14 12.1,20.013 12.1,18.4 12.425,18.075 U6.2
MAX232_VS-: C22.2 U6.6 | length 2.6
  Bottom Layer w0.254: U6.6 13.855,13 C22.2@16.4,13
MCP2515_CS_1: R2N.15 U1.19 | length 5.7
  Bottom Layer w0.254: U1.19 32.125,41.5 R2N.15
MCP2515_CS_2: R2N.2 U3.16 | length 24.1
  Bottom Layer w0.254: R2N.2 38.483,41.375 45.546,34.312 45.546,26.646 43.16,24.26 U3.16
MCP2515_INT_1: R2N.11 U1.25 | length 6.5
  Bottom Layer w0.254: U1.25 26.684,38.5 28.889,36.295 R2N.11
MCP2515_INT_2: R2N.6 U3.12 | length 13.8
  Bottom Layer w0.254: R2N.6 40.995,36.295 43.73,33.56 43.73,29.966 43.104,29.34 U3.12
MCP2515_OSC1: C8.1 U3.8 Y2.1 | length 19.7
  Top Layer w0.254: v1(34.875,30.525) 34.325,30.525 33.688,29.888 33.688,28.412 37.6,24.5 37.6,18.65 38.15,18.1 40.1,18.1 Y2.1
  Bottom Layer w0.254: U3.8 34.79,30.61 v1(34.875,30.525)
MCP2515_OSC2: C7.1 U3.7 Y2.2 | length 14.9
  Top Layer w0.254: v1(34.875,28.975) 34.875,28.825 42.2,21.5 42.2,20.15 Y2.2
  Bottom Layer w0.254: U3.7 34.36,29.34 34.725,28.975 v1(34.875,28.975)
MCP2515_RESET_1: R2N.16 U1.18 | length 5.9
  Bottom Layer w0.254: U1.18 26.65,42.002 31.607,42.002 R2N.16
MCP2515_RESET_2: R2N.1 U3.17 | length 26.6
  Bottom Layer w0.254: R2N.1 37.855,42.645 46,34.5 46,25.8 43.19,22.99 U3.17
MCP2515_RX0BUF_1: R2N.10 U1.26 | length 7.9
  Bottom Layer w0.254: U1.26 27.592,36.95 29.517,35.025 R2N.10
MCP2515_RX0BUF_2: R2N.7 U3.11 | length 11.3
  Bottom Layer w0.254: R2N.7 41.623,35.025 43.276,33.372 43.276,30.782 43.104,30.61 U3.11
MCP2515_RX1BUF_1: R2N.9 U1.29 | length 11.2
  Bottom Layer w0.254: U1.29 23.6,35.108 24.108,34.6 25.7,34.6 26.677,33.623 32.118,33.623 R2N.9
MCP2515_RX1BUF_2: R2N.8 U3.10 | length 5.5
  Bottom Layer w0.254: R2N.8 38.245,33.755 40.12,31.88 U3.10
MCP2515_SCK_1: R2N.12 U1.22 | length 6.6
  Bottom Layer w0.254: U1.22 29.412,40 31.847,37.565 R2N.12
MCP2515_SCK_2: R2N.5 U3.13 | length 16.4
  Bottom Layer w0.254: R2N.5 40.367,37.565 44.184,33.748 44.184,29.15 43.104,28.07 U3.13
MCP2515_SI_1: R2N.13 U1.20 | length 9.4
  Bottom Layer w0.254: U1.20 31.088,41 31.34,40.748 33.144,40.748 33.552,40.34 33.552,39.87 32.517,38.835 R2N.13
MCP2515_SI_2: R2N.4 U3.14 | length 18.9
  Bottom Layer w0.254: R2N.4 39.739,38.835 44.638,33.936 44.638,28.338 43.1,26.8 U3.14
MCP2515_SO_1: R2N.14 U1.21 | length 5.8
  Bottom Layer w0.254: U1.21 30.15,40.5 30.545,40.105 R2N.14
MCP2515_SO_2: R2N.3 U3.15 | length 21.5
  Bottom Layer w0.254: R2N.3 39.111,40.105 45.092,34.124 45.092,27.492 43.13,25.53 U3.15
MCP2515_TX0RTS_1: R1N.9 U1.17 | length 6.5
  Bottom Layer w0.254: U1.17 30.195,42.5 R1N.9
MCP2515_TX0RTS_2: R1N.8 U3.4 | length 22.9
  Bottom Layer w0.254: U3.4 34.63,25.53 36.031,26.931 36.031,32.986 35.673,33.344 35.673,44.273 35.955,44.555 R1N.8
MCP2515_TX1RTS_1: R1N.10 U1.16 | length 12.2
  Top Layer w0.254: v1(24.3,42.225) 28.425,42.225 v1@30.2,44
  Bottom Layer w0.254: v1(24.3,42.225) 24.3,42.4 24.9,43 U1.16 ; v1@30.2,44 30.2,44.042 31.983,45.825 R1N.10
  other v1: 30.15,44
MCP2515_TX1RTS_2: R1N.7 U3.5 | length 23
  Bottom Layer w0.254: U3.5 34.6,26.8 35.577,27.777 35.577,32.798 35.219,33.156 35.219,45.219 35.825,45.825 R1N.7
MCP2515_TX2RTS_1: R1N.11 U1.15 | length 11.7
  Top Layer w0.254: v1(24.4,43.5) 28.1,43.5 30.25,45.65 v1(30.3,45.65)
  Bottom Layer w0.254: v1(24.4,43.5) U1.15 ; v1(30.3,45.65) 30.25,45.65 31.695,47.095 R1N.11
MCP2515_TX2RTS_2: R1N.6 U3.6 | length 23.9
  Bottom Layer w0.254: U3.6 31.43,28.07 31.073,28.427 31.073,32.167 31.806,32.9 33.2,32.9 34.7,34.4 34.7,45.5 36.295,47.095 R1N.6
MCP6001_VP: R1.2 R2.2 U5.1 | length 17.4
  Top Layer w0.254: U5.1 36.45,51.15 37.102,50.498 38.056,50.498 38.777,49.777 38.777,45.777 v1(38.7,45.7)
  Bottom Layer w0.254: v1(38.7,45.7) 38.7,43.325 40.425,41.6 R1.2 R2.2@43.3,39.802
RN41_CTS_1: R4N.8 U1.45 | length 7.5
  Bottom Layer w0.254: U1.45 15.6,34.184 15.984,33.8 17.2,33.8 18.645,32.355 R4N.8
RN41_CTS_2: R4N.9 U2.16 | length 25.2
  Top Layer w0.254: U2.16 12.1,10.4 12.877,11.177 16.677,11.177 21.475,15.975 v1(21.475,19.4)
  Bottom Layer w0.254: R4N.9 18.645,22.155 21.4,19.4 v1(21.475,19.4)
RN41_RTS_1: R4N.7 U1.46 | length 6.8
  Bottom Layer w0.254: U1.46 15.1,34.042 15.842,33.3 16.4,33.3 17.375,32.325 R4N.7
RN41_RTS_2: R4N.10 U2.15 | length 25.2
  Top Layer w0.254: U2.15 10.9,10.4 12.131,11.631 16.131,11.631 20.2,15.7 v1(20.2,19.4)
  Bottom Layer w0.254: R4N.10 17.375,22.225 v1(20.2,19.4)
RN41_RX_1: R4N.5 U1.48 | length 5.8
  Bottom Layer w0.254: U1.48 14.1,33.7 14.835,32.965 R4N.5
RN41_RX_2: R4N.12 U2.13 | length 24.8
  Top Layer w0.254: U2.13 8.5,10.5 10.6,12.6 13.85,12.6 17.725,16.475 v1(17.725,19.4)
  Bottom Layer w0.254: R4N.12 14.835,22.565 17.725,19.675 v1(17.725,19.4)
RN41_TX_1: R4N.6 U1.47 | length 6.1
  Bottom Layer w0.254: U1.47 14.6,33.9 16.105,32.395 R4N.6
RN41_TX_2: R4N.11 U2.14 | length 25
  Top Layer w0.254: U2.14 9.7,10.4 11.385,12.085 14.935,12.085 18.975,16.125 v1(18.975,19.4)
  Bottom Layer w0.254: R4N.11 16.105,22.395 18.975,19.525 v1(18.975,19.4)
RS232_RXD: P6.6 U6.8 | length 39.1
  Top Layer w0.254: v1(17.05,6.7) 17.949,6.7 19.449,5.2 20.6,5.2 21.673,4.127 21.673,3.357 22.23,2.8 38.735,2.8 39.856,3.921 39.856,3.931 40.55,4.625 42.925,4.625 43.125,4.825 43.125,6.575 42.1,7.6 P6.6@42.1,8.2
  Bottom Layer w0.254: U6.8 15.92,10.455 17.05,9.325 v1(17.05,6.7)
RS232_TXD: P6.3 U6.7 | length 37.7
  Top Layer w0.254: v1@13.875,7.225 14.077,7.427 19.573,7.427 22.3,4.7 35.1,4.7 36.5,3.3 38.593,3.3 39.402,4.109 39.402,4.119 41.043,5.76 P6.3@42.06,5.76
  Bottom Layer w0.254: v1(13.6,7.275) 13.6,8.075 12.05,9.625 12.05,11.45 12.325,11.725 U6.7
RT_PBADC2_IN: R9.2 RT1.1 U1.7 | length 11.5
  Top Layer w0.254: v1(24.4,47.6) 25.8,47.6 27.602,49.402 R9.2@27.602,51.884 ; R9.2 27.466,51.984 RT1.1
  Bottom Layer w0.254: v1(24.4,47.6) 24.477,47.523 26.627,47.523 U1.7
RT_PBADC2_OUT: R9.1 U1.96 | length 7.2
  Top Layer w0.254: v1(25.8,54.5) 27.082,54.5 27.682,53.9 R9.1@27.798,54.016
  Bottom Layer w0.254: U1.96 23.123,52.05 23.123,53.139 23.261,53.277 25.577,53.277 25.8,53.5 v1(25.8,54.5)
TJA1040_RXD_1: R13.1 U3.2 | length 5.6
  Top Layer w0.254: R13.1@36.1,20.702 36.1,22.45 v1(36.125,22.475)
  Bottom Layer w0.254: U3.2 32.56,23 35.1,23 35.625,22.475 v1(36.125,22.475)
TJA1040_RXD_2: R13.2 U4.4 | length 21.5
  Top Layer w0.254: U4.4 33.853,5.298 30.234,5.298 29.823,5.709 29.823,16.765 33.458,20.4 33.859,20.4 R13.2
TJA1040_SPLIT: C2.2 R10.2 R11.2 U4.5 | length 16
  Top Layer w0.254: v1(38.7,4.4) 38.7,5.445 U4.5
  Bottom Layer w0.254: v1@38.8,4.4 38.8,6.646 40.1,7.946 40.1,10.5 42.2,12.6 R10.2@42.9,13.2 ; C2.2 R10.2@42.9,13.2 ; R11.2@45.227,13.2 R10.2@42.9,13.2
TJA1040_STB_1: R1N.12 U1.12 | length 7.1
  Bottom Layer w0.254: U1.12 28.358,45 28.423,45.065 28.423,45.235 28.615,45.427 28.669,45.427 31.427,48.185 31.427,48.239 31.553,48.365 R1N.12
TJA1040_STB_2: R1N.5 U4.8 | length 49.7
  Top Layer w0.254: v1(28.65,21.9) 28.65,22.25 28.3,22.6 28.3,27.907 30.902,30.509 30.902,44.002 v1@34.712,47.813 ; v1(36.3,9.225) 38.67,9.225 U4.8
  Bottom Layer w0.254: v1(28.65,21.9) 28.65,20.05 36.5,12.2 36.3,12 v1(36.3,9.225) ; v1(34.7,47.825) 35.275,48.4 36.915,48.4 R1N.5
TJA1040_TXD_1: R12.1 U3.1 | length 8.4
  Top Layer w0.254: v1(34.125,16.975) 35.1,16.975 36.116,17.991 R12.1@36.116,18.625
  Bottom Layer w0.254: U3.1 32.55,18.55 v1(34.125,16.975)
TJA1040_TXD_2: R12.2 U4.1 | length 15
  Top Layer w0.254: U4.1 31.495,9.305 30.398,10.402 30.398,16.698 32.398,18.698 R12.2@34.2,18.698
VCC_VR1: C1.2 C9.1 C11.1 C12.1 C13.1 C14.1 C23.1 C24.1 C25.1 C26.1 C27.1 C28.1 C29.1 C30.1 L1.2 L2.2 P2.A2 P4.2 P5.2 R3.1 U1.14 U1.24 U1.34 U1.44 U1.54 U1.64 U1.74 U1.83 U1.95 U2.11 U3.18 U5.5 VR1.2 | length 220.1
  Top Layer w0.254: v1@6.9,23.3 7.9,24.3 7.9,25.4 ; U2.11 9.7,23.6 7.9,25.4 ; v1(14.3,41.7) 7.7,35.1 7.7,28.84 P5.2 7.9,25.84 7.9,25.4 ; v1@18.1,50.5 20.282,50.5 L2.2 L1.2 ; v1(30.6,58.1) 30.9,58.4 VR1.2 32.95,58.273 34.527,58.273 C9.1@34.9,57.9 ; v1(33.862,36.938) 33.862,37.378 35.2,38.716 ; v1(34,52.3) 36.75,52.3 U5.5 ; v1(44.9,46.525) 43.009,46.525 35.2,38.716 ; v1(45.225,21.925) 45.225,22.975 35.2,33 35.2,38.716
  Bottom Layer w0.254: C14.1 4.64,27.44 P5.2 ; C1.2 4.2,55.7 4.2,50.975 P4.2@5.775,49.4 ; P4.2 7.4,50.4 C29.1 9.9,50 U1.74 13.2,50 14.2,49 15.55,49 16.6,50.05 U1.83 16.577,52.073 16.577,53.498 C23.1 ; C13.1@6.7,21 v1(6.7,23) ; C24.1 9,40 U1.54 12.6,40 v1(14.3,41.7) ; C28.1@9.854,45.046 9.877,45.023 11.527,45.023 U1.64 12.8,45 14.3,46.5 ; 14.9,49 14.9,47.1 ; C30.1@16.1,35.2 U1.44 16.1,38.558 15.1,39.558 15.1,40.9 v1(14.3,41.7) ; v1@18.1,50.5 18.1,48.854 16.346,47.1 ; C25.1 21.1,35.2 U1.34 21.1,38.565 17.6,42.065 ; 28.7,43.3 28,44 U1.14 25.4,44 25.198,44.202 23.672,44.202 21.535,42.065 ; v1(33.862,36.938) 29.762,36.938 C26.1 27.7,39 U1.24 24.6,39 21.535,42.065 ; v1(34,52.3) 34,54.3 32.925,55.375 ; P2.A2@36.794,59.7 P2.A2 36.8,57.3 C12.1 34.875,55.375 32.925,55.375 ; U3.18 41.83,21.9 45.25,21.9 C11.1@45.25,19.425 ; R3.1 44.877,46.548 v1(44.9,46.525) ; v1(14.3,41.7) 14.3,42.8 ; 14.3,42.8 14.3,46.5 ; 14.3,42.8 16.865,42.8 17.6,42.065 ; 14.3,46.5 14.9,47.1 ; 14.9,47.1 16.346,47.1 ; 16.346,47.1 22,47.1 22.577,47.677 22.577,52.027 U1.95 22.623,52.05 22.623,53.281 23.073,53.731 24.038,53.731 25.509,55.202 27.702,55.202 v1(30.6,58.1) 30.6,57.7 32.925,55.375 ; 17.6,42.065 21.535,42.065
  other v1: 18.1,50.225
VCC_VR2: C16.2 C17.2 P1.P2 R4.1 VR2.2 | length 99.8
  Top Layer w0.254: C17.2@14.8,3.6 16.4,3.6 P1.P2 17.7,4.9 18.6,4.9 19.5,4 19.5,1.53 20.157,0.873 v1@37.473,0.873 ; v1(37.5,0.9) 37.746,0.9 40.973,4.127 45.177,4.127 45.725,4.675 45.725,9.125 47.425,10.825 v1(47.425,51.625)
  Bottom Layer w0.254: C16.2@30.6,8.6 31.75,8.6 VR2.2 34,9.4 35.35,8.05 35.35,4.092 35.344,4.086 35.344,3.056 v1(37.5,0.9) ; R4.1 45.45,51.6 v1@47.425,51.6
VCC_VR3: C3.1 C19.2 C20.2 R5.1 U4.3 U6.16 VR3.3 | length 101.3
  Top Layer w0.254: v1@11.35,23.7 11.45,23.8 24.6,23.8 26.3,22.1 v1(26.3,19) ; v1@29.902,21.9 29.902,28.225 31.81,30.133 31.81,35.968 45.1,49.258 45.1,51.6 46.25,52.75 v1(46.25,53) ; U4.3@34.05,6.7 35,6.7 35.6,7.3 35.6,8.932 35.598,8.934 35.598,10.748 VR3.3 ; C3.1@34.3,11.6 34.6,11.3 VR3.3 ; v1(38.9,12.9) 37.3,11.3 VR3.3
  Bottom Layer w0.254: C20.2@6.755,19.345 U6.16 10.305,20.7 11.35,20.7 v1(11.35,23.8) ; v1(26.3,19) 26,19.3 26,21.425 28.125,23.55 28.85,23.55 30,22.4 v1(30,21.9) 30,19.6 36.3,13.3 38.6,13.3 38.9,13 v1(38.9,12.9) ; R5.1@45.416,55.198 45.4,55.182 46.25,54.332 v1(46.25,53)
VR1_PBADC5_1: R1N.14 U1.10 | length 8.2
  Bottom Layer w0.254: U1.10 27.9,46 30.519,48.619 30.519,48.813 30.973,49.267 30.973,50.073 31.805,50.905 R1N.14
VR1_PBADC5_2: R1N.3 R3.2 R6.2 | length 9.2
  Bottom Layer w0.254: R1N.3 38.602,50.905 41.275,48.232 R3.2 41.275,44.5 R6.2
VR2_PBADC4_1: R1N.15 U1.9 | length 9.3
  Bottom Layer w0.254: U1.9 27.758,46.5 30.065,48.807 30.065,51.165 31.075,52.175 R1N.15
VR2_PBADC4_2: R1N.2 R4.2 R7.2 | length 8.7
  Bottom Layer w0.254: R1N.2 37.523,51.602 43.034,51.602 R4.2 R7.2@43.284,49.375
VR3_PBADC3_1: R1N.16 U1.8 | length 10
  Bottom Layer w0.254: U1.8 27.616,47 29.611,48.995 29.611,52.011 31.045,53.445 R1N.16
VR3_PBADC3_2: R1N.1 R5.2 R8.2 | length 10.3
  Bottom Layer w0.254: R1N.1 38.262,53.445 38.909,52.798 39.791,52.798 39.793,52.8 42.5,52.8 43.5,53.8 43.5,55.2 R8.2
XMEGA_AVCC1: L1.1 U1.94 | length 5.2
  Top Layer w0.254: L1.1 22.3,54.2 v1(22.6,54.5)
  Bottom Layer w0.254: U1.94 22.077,52.073 22.077,53.977 v1(22.6,54.5)
XMEGA_AVCC2: L2.1 U1.4 | length 5.9
  Top Layer w0.254: L2.1 22.3,49.775 v1(23.45,48.625) v1@23.575,48.5
  Bottom Layer w0.254: v1(23.45,48.625) 23.575,48.5 24.9,48.5 25.4,49 U1.4
XMEGA_XTAL1: C6.1 U1.92 Y1.2 | length 11.9
  Bottom Layer w0.254: U1.92 21.098,52.052 21.098,53.991 22.309,55.202 24.391,55.202 24.393,55.2 24.865,55.2 24.975,55.31 24.975,56.1 24.512,56.563 24.512,58.988 24.1,59.4 Y1.2@25.2,59.4
XMEGA_XTAL2: C5.1 U1.91 Y1.1 | length 9.3
  Bottom Layer w0.254: Y1.1@16.5,59.4 17.6,59.4 C5.1@20.75,56.25 ; U1.91 C5.1@20.6,55.7 ; C5.1@20.6,56.3 C5.1@20.6,56.4
pads on no net: P1.P3 P1.P12 P1.P13 P1.P14 P1.P15 P1.P16 P1.P17 P1.P18 P1.P19 P1.P20 P4.3 P4.4 P5.3 U1.1 U1.2 U1.5 U1.6 U1.30 U1.49 U1.58 U1.59 U1.60 U1.61 U1.62 U1.65 U1.66 U1.67 U1.68 U1.69 U1.70 U1.71 U1.72 U1.75 U1.79 U1.80 U1.81 U1.82 U1.85 U1.86 U1.87 U1.88 U1.97 U1.98 U1.99 U1.100 U2.2 U2.3 U2.4 U2.5 U2.6 U2.7 U2.8 U2.9 U2.10 U2.17 U2.18 U2.19 U2.20 U2.21 U2.22 U2.23 U2.24 U2.30 U2.31 U2.32 U2.33 U2.34 U2.35 U2.SH1 U2.SH2 U2.SH3 U2.SH4 U6.11 U6.12 U6.13 U6.14

## Polygon pours and split planes (outlines as drawn)
GND on Top Layer "Top Layer-GND" (solid, remove dead copper, pour order 4): 0.4,61.8 48.4,61.8 48.4,0.4 0.4,0.4